# EAGLE board ConnectorPanel (EAGLE 6.6.0), part 1 of 5
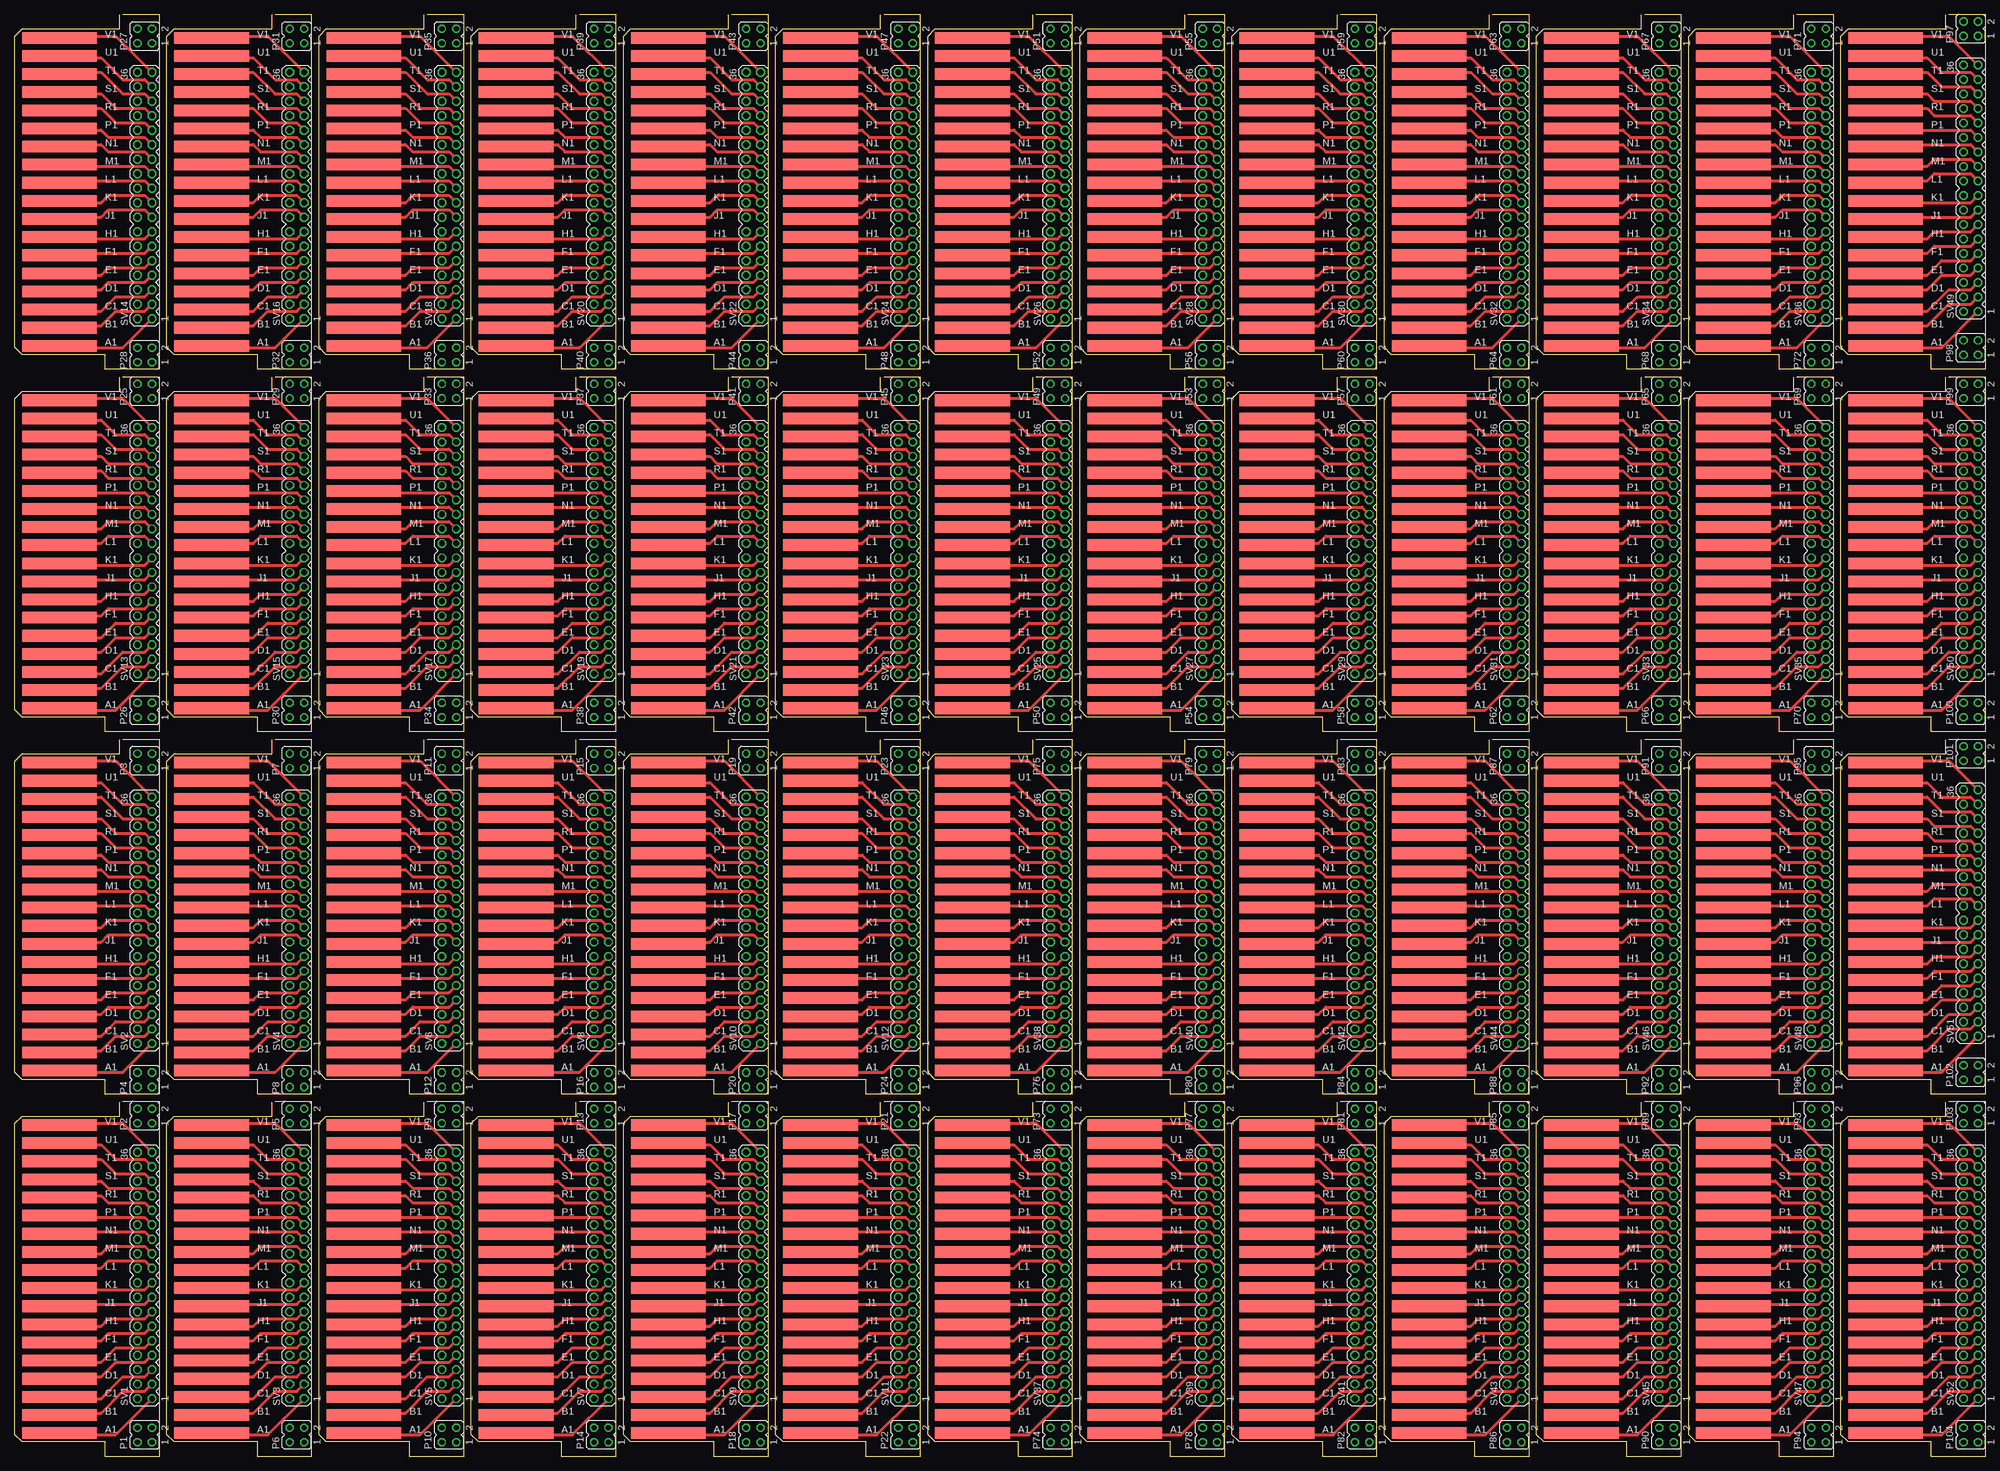
[diagram p0: board, top side]
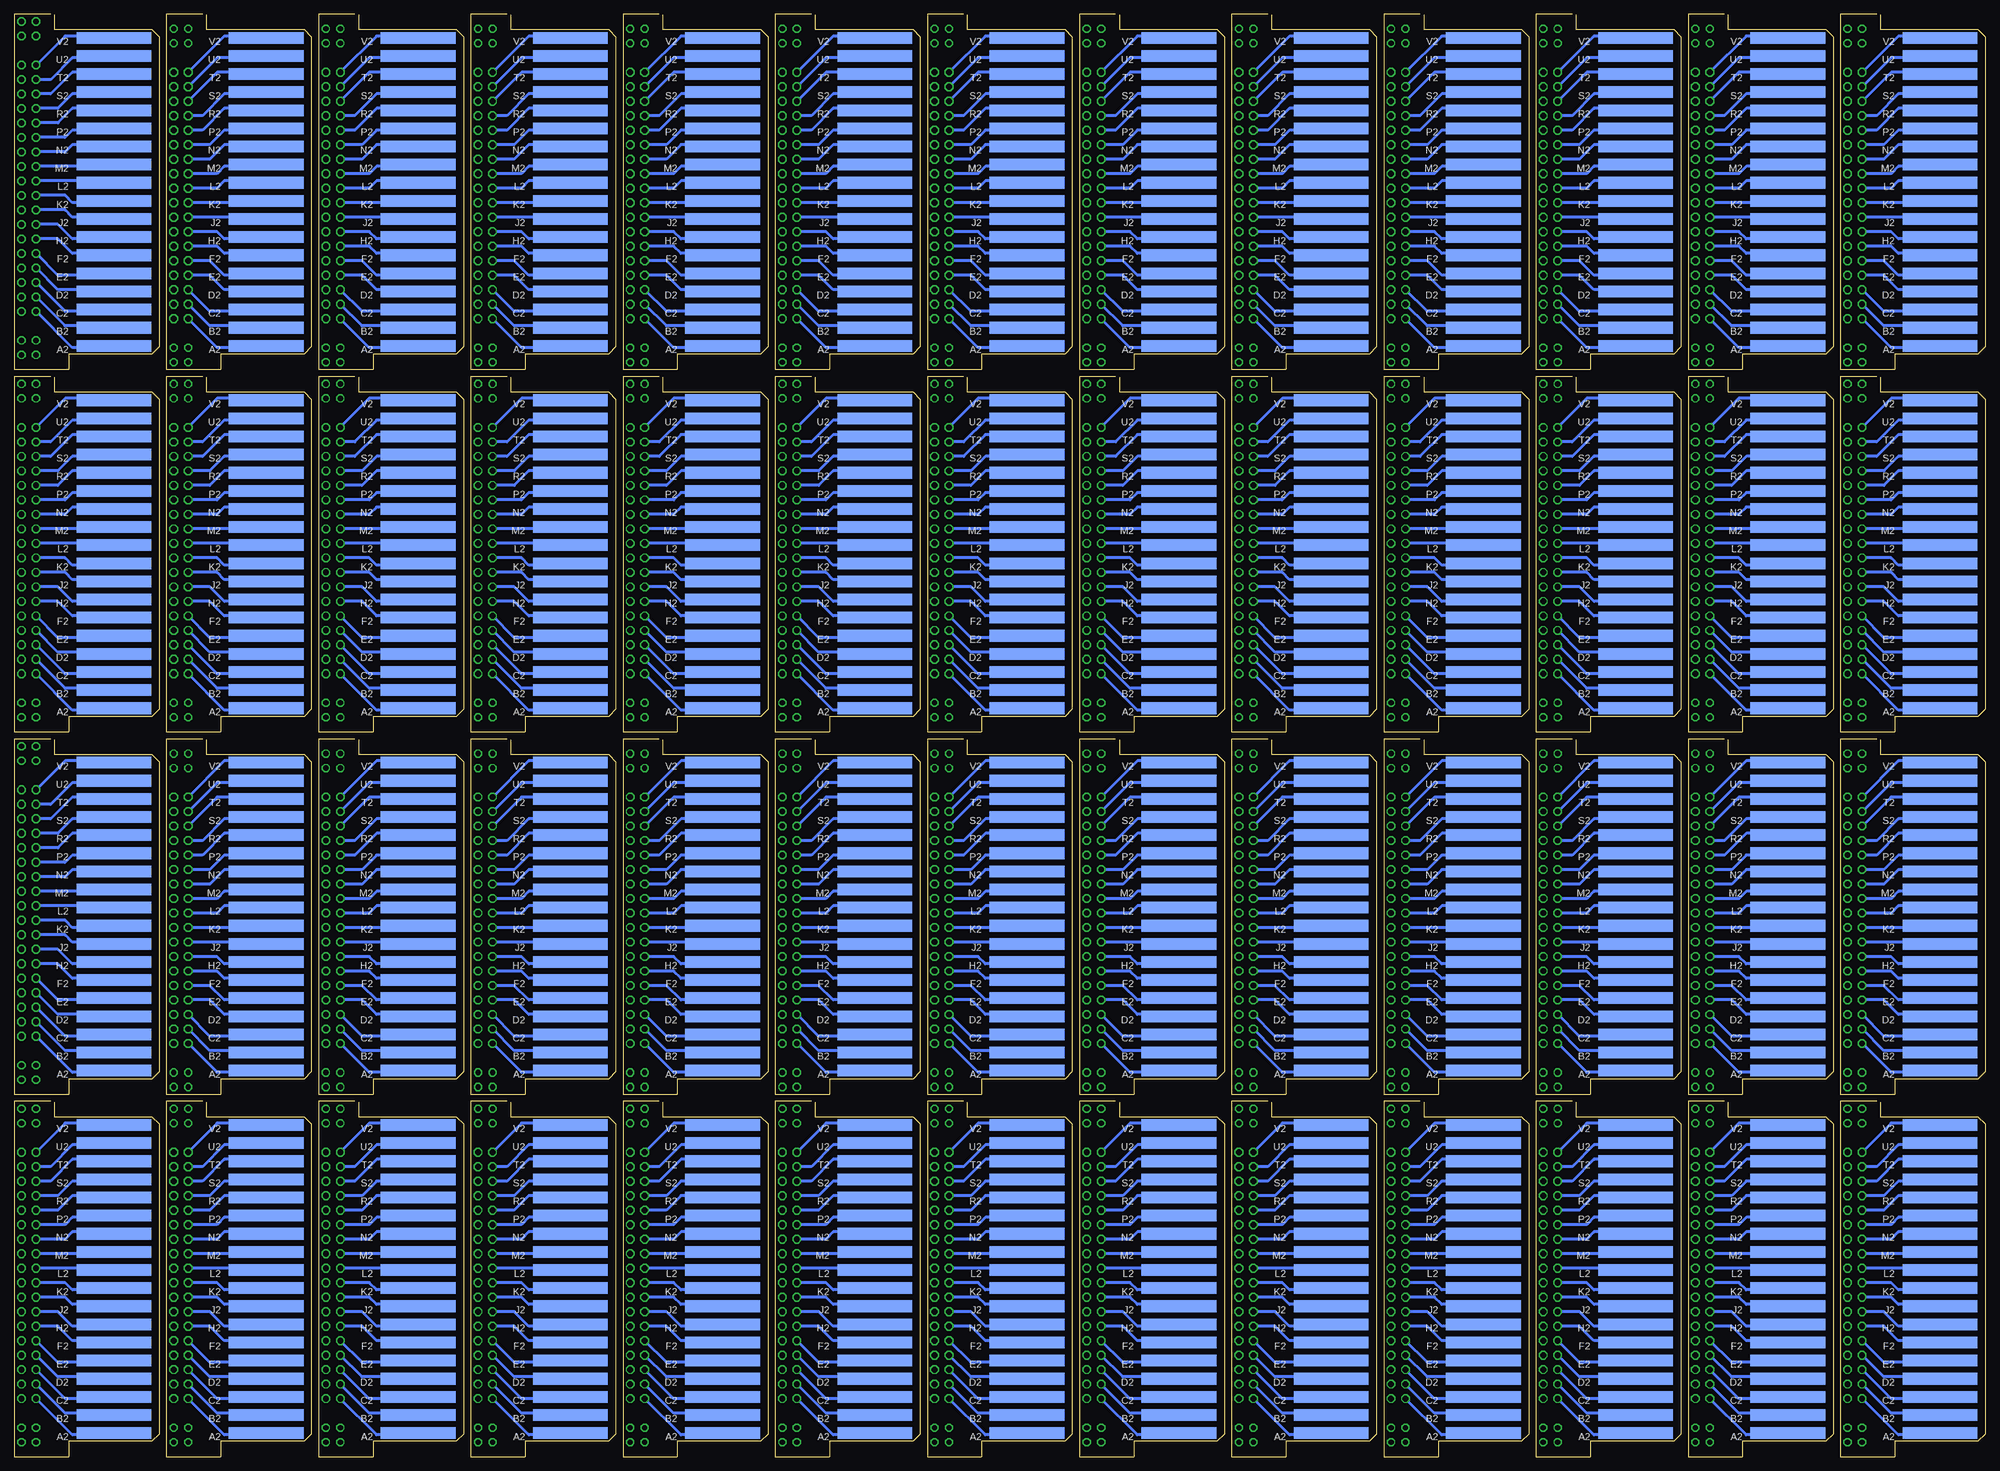
[diagram p1: board, bottom side, seen from below]

Size 345.44 x 252.73 mm. Coordinates in mm from the lower left corner, seen from the top.
Outline: 19.05,62.23 25.4,62.23 25.4,0 15.88,0
Outline: 19.05,125.73 25.4,125.73 25.4,63.5 15.88,63.5
Outline: 45.72,62.23 52.07,62.23 52.07,0 42.55,0
Outline: 42.55,63.5 52.07,63.5 52.07,125.73 45.72,125.73
Outline: 72.39,62.23 78.74,62.23 78.74,0 69.22,0
Outline: 72.39,125.73 78.74,125.73 78.74,63.5 69.22,63.5
Outline: 99.06,62.23 105.41,62.23 105.41,0 95.89,0
Outline: 95.89,63.5 105.41,63.5 105.41,125.73 99.06,125.73
Outline: 125.73,62.23 132.08,62.23 132.08,0 122.56,0
Outline: 125.73,125.73 132.08,125.73 132.08,63.5 122.56,63.5
Outline: 152.4,62.23 158.75,62.23 158.75,0 149.22,0
Outline: 149.22,63.5 158.75,63.5 158.75,125.73 152.4,125.73
Outline: 19.05,189.23 25.4,189.23 25.4,127 15.88,127
Outline: 19.05,252.73 25.4,252.73 25.4,190.5 15.88,190.5
Outline: 45.72,189.23 52.07,189.23 52.07,127 42.55,127
Outline: 42.55,190.5 52.07,190.5 52.07,252.73 45.72,252.73
Outline: 72.39,189.23 78.74,189.23 78.74,127 69.22,127
Outline: 72.39,252.73 78.74,252.73 78.74,190.5 69.22,190.5
Outline: 99.06,189.23 105.41,189.23 105.41,127 95.89,127
Outline: 95.89,190.5 105.41,190.5 105.41,252.73 99.06,252.73
Outline: 125.73,189.23 132.08,189.23 132.08,127 122.56,127
Outline: 125.73,252.73 132.08,252.73 132.08,190.5 122.56,190.5
Outline: 152.4,189.23 158.75,189.23 158.75,127 149.22,127
Outline: 149.22,190.5 158.75,190.5 158.75,252.73 152.4,252.73
Outline: 179.07,189.23 185.42,189.23 185.42,127 175.9,127
Outline: 179.07,252.73 185.42,252.73 185.42,190.5 175.9,190.5
Outline: 205.74,189.23 212.09,189.23 212.09,127 202.56,127
Outline: 202.56,190.5 212.09,190.5 212.09,252.73 205.74,252.73
Outline: 232.41,189.23 238.76,189.23 238.76,127 229.24,127
Outline: 232.41,252.73 238.76,252.73 238.76,190.5 229.24,190.5
Outline: 259.08,189.23 265.43,189.23 265.43,127 255.91,127
Outline: 255.91,190.5 265.43,190.5 265.43,252.73 259.08,252.73
Outline: 285.75,189.23 292.1,189.23 292.1,127 282.57,127
Outline: 285.75,252.73 292.1,252.73 292.1,190.5 282.57,190.5
Outline: 312.42,189.23 318.77,189.23 318.77,127 309.25,127
Outline: 309.25,190.5 318.77,190.5 318.77,252.73 312.42,252.73
Outline: 179.07,62.23 185.42,62.23 185.42,0 175.9,0
Outline: 179.07,125.73 185.42,125.73 185.42,63.5 175.9,63.5
Outline: 205.74,62.23 212.09,62.23 212.09,0 202.56,0
Outline: 202.56,63.5 212.09,63.5 212.09,125.73 205.74,125.73
Outline: 232.41,62.23 238.76,62.23 238.76,0 229.24,0
Outline: 232.41,125.73 238.76,125.73 238.76,63.5 229.24,63.5
Outline: 259.08,62.23 265.43,62.23 265.43,0 255.91,0
Outline: 255.91,63.5 265.43,63.5 265.43,125.73 259.08,125.73
Outline: 285.75,62.23 292.1,62.23 292.1,0 282.57,0
Outline: 285.75,125.73 292.1,125.73 292.1,63.5 282.57,63.5
Outline: 312.42,62.23 318.77,62.23 318.77,0 309.25,0
Outline: 309.25,63.5 318.77,63.5 318.77,125.73 312.42,125.73
Outline: 339.09,252.73 345.44,252.73 345.44,190.5 335.92,190.5
Outline: 339.09,189.23 345.44,189.23 345.44,127 335.92,127
Outline: 339.09,125.73 345.44,125.73 345.44,63.5 335.92,63.5
Outline: 339.09,62.23 345.44,62.23 345.44,0 335.92,0
Copper layers (1+16): Top 0.035mm / dielectric 1.5mm / Bottom 0.035mm
Design rules "16mils": minimum track width 16mil, minimum drill 32mil, track to track 15mil, track to pad 10mil, pad to pad 10mil, via to via 10mil, smd to smd 10mil, copper to edge 13mil, drill to drill 10mil, minimum pad ring 10mil, minimum via ring 8mil, stop-mask expansion 0mil, vias tented up to drill 0mil, thermal gap 10mil
Net classes: 0 default: width 0.508 mm

## Footprints (pad centres in the part's own frame; a part is rotated, then mirrored left to right if it is on the bottom)
JP2Q = drill 0.914 octagon: 1 -1.27,-1.27; 2 -1.27,1.27; 3 1.27,-1.27; 4 1.27,1.27
MA18-2 = drill 1.016 octagon: 1 -21.59,-1.27; 2 -21.59,1.27; 3 -19.05,-1.27; 4 -19.05,1.27; 5 -16.51,-1.27; 6 -16.51,1.27; 7 -13.97,-1.27; 8 -13.97,1.27; 9 -11.43,-1.27; 10 -11.43,1.27; 11 -8.89,-1.27; 12 -8.89,1.27; 13 -6.35,-1.27; 14 -6.35,1.27; 15 -3.81,-1.27; 16 -3.81,1.27; 17 -1.27,-1.27; 18 -1.27,1.27; 19 1.27,-1.27; 20 1.27,1.27; 21 3.81,-1.27; 22 3.81,1.27; 23 6.35,-1.27; 24 6.35,1.27; 25 8.89,-1.27; 26 8.89,1.27; 27 11.43,-1.27; 28 11.43,1.27; 29 13.97,-1.27; 30 13.97,1.27; 31 16.51,-1.27; 32 16.51,1.27; 33 19.05,-1.27; 34 19.05,1.27; 35 21.59,-1.27; 36 21.59,1.27
EDGE-CON2 = smd 13.106 x 2.032: A1 7.938,4.128; B1 7.938,7.303; C1 7.938,10.477; D1 7.938,13.652; E1 7.938,16.828; F1 7.938,20.003; H1 7.938,23.177; J1 7.938,26.352; K1 7.938,29.527; L1 7.938,32.703; M1 7.938,35.877; N1 7.938,39.053; P1 7.938,42.227; R1 7.938,45.403; S1 7.938,48.578; T1 7.938,51.752; U1 7.938,54.928; V1 7.938,58.102 | smd 13.106 x 2.032 bottom: A2 7.938,4.128; B2 7.938,7.303; C2 7.938,10.477; D2 7.938,13.652; E2 7.938,16.828; F2 7.938,20.003; H2 7.938,23.177; J2 7.938,26.352; K2 7.938,29.527; L2 7.938,32.703; M2 7.938,35.877; N2 7.938,39.053; P2 7.938,42.227; R2 7.938,45.403; S2 7.938,48.578; T2 7.938,51.752; U2 7.938,54.928; V2 7.938,58.102

## Placement (x,y rotation side)
P1  [JP2Q]  22.86,3.81 90 top
P2  [JP2Q]  22.86,59.69 90 top
P3  [JP2Q]  22.86,121.92 90 top
P4  [JP2Q]  22.86,66.04 90 top
P5  [JP2Q]  49.53,59.69 90 top
P6  [JP2Q]  49.53,3.81 90 top
P7  [JP2Q]  49.53,121.92 90 top
P8  [JP2Q]  49.53,66.04 90 top
P9  [JP2Q]  76.2,59.69 90 top
P10  [JP2Q]  76.2,3.81 90 top
P11  [JP2Q]  76.2,121.92 90 top
P12  [JP2Q]  76.2,66.04 90 top
P13  [JP2Q]  102.87,59.69 90 top
P14  [JP2Q]  102.87,3.81 90 top
P15  [JP2Q]  102.87,121.92 90 top
P16  [JP2Q]  102.87,66.04 90 top
P17  [JP2Q]  129.54,59.69 90 top
P18  [JP2Q]  129.54,3.81 90 top
P19  [JP2Q]  129.54,121.92 90 top
P20  [JP2Q]  129.54,66.04 90 top
P21  [JP2Q]  156.21,59.69 90 top
P22  [JP2Q]  156.21,3.81 90 top
P23  [JP2Q]  156.21,121.92 90 top
P24  [JP2Q]  156.21,66.04 90 top
P25  [JP2Q]  22.86,186.69 90 top
P26  [JP2Q]  22.86,130.81 90 top
P27  [JP2Q]  22.86,248.92 90 top
P28  [JP2Q]  22.86,193.04 90 top
P29  [JP2Q]  49.53,186.69 90 top
P30  [JP2Q]  49.53,130.81 90 top
P31  [JP2Q]  49.53,248.92 90 top
P32  [JP2Q]  49.53,193.04 90 top
P33  [JP2Q]  76.2,186.69 90 top
P34  [JP2Q]  76.2,130.81 90 top
P35  [JP2Q]  76.2,248.92 90 top
P36  [JP2Q]  76.2,193.04 90 top
P37  [JP2Q]  102.87,186.69 90 top
P38  [JP2Q]  102.87,130.81 90 top
P39  [JP2Q]  102.87,248.92 90 top
P40  [JP2Q]  102.87,193.04 90 top
P41  [JP2Q]  129.54,186.69 90 top
P42  [JP2Q]  129.54,130.81 90 top
P43  [JP2Q]  129.54,248.92 90 top
P44  [JP2Q]  129.54,193.04 90 top
P45  [JP2Q]  156.21,186.69 90 top
P46  [JP2Q]  156.21,130.81 90 top
P47  [JP2Q]  156.21,248.92 90 top
P48  [JP2Q]  156.21,193.04 90 top
P49  [JP2Q]  182.88,186.69 90 top
P50  [JP2Q]  182.88,130.81 90 top
P51  [JP2Q]  182.88,248.92 90 top
P52  [JP2Q]  182.88,193.04 90 top
P53  [JP2Q]  209.55,186.69 90 top
P54  [JP2Q]  209.55,130.81 90 top
P55  [JP2Q]  209.55,248.92 90 top
P56  [JP2Q]  209.55,193.04 90 top
P57  [JP2Q]  236.22,186.69 90 top
P58  [JP2Q]  236.22,130.81 90 top
P59  [JP2Q]  236.22,248.92 90 top
P60  [JP2Q]  236.22,193.04 90 top
P61  [JP2Q]  262.89,186.69 90 top
P62  [JP2Q]  262.89,130.81 90 top
P63  [JP2Q]  262.89,248.92 90 top
P64  [JP2Q]  262.89,193.04 90 top
P65  [JP2Q]  289.56,186.69 90 top
P66  [JP2Q]  289.56,130.81 90 top
P67  [JP2Q]  289.56,248.92 90 top
P68  [JP2Q]  289.56,193.04 90 top
P69  [JP2Q]  316.23,186.69 90 top
P70  [JP2Q]  316.23,130.81 90 top
P71  [JP2Q]  316.23,248.92 90 top
P72  [JP2Q]  316.23,193.04 90 top
P73  [JP2Q]  182.88,59.69 90 top
P74  [JP2Q]  182.88,3.81 90 top
P75  [JP2Q]  182.88,121.92 90 top
P76  [JP2Q]  182.88,66.04 90 top
P77  [JP2Q]  209.55,59.69 90 top
P78  [JP2Q]  209.55,3.81 90 top
P79  [JP2Q]  209.55,121.92 90 top
P80  [JP2Q]  209.55,66.04 90 top
P81  [JP2Q]  236.22,59.69 90 top
P82  [JP2Q]  236.22,3.81 90 top
P83  [JP2Q]  236.22,121.92 90 top
P84  [JP2Q]  236.22,66.04 90 top
P85  [JP2Q]  262.89,59.69 90 top
P86  [JP2Q]  262.89,3.81 90 top
P87  [JP2Q]  262.89,121.92 90 top
P88  [JP2Q]  262.89,66.04 90 top
P89  [JP2Q]  289.56,59.69 90 top
P90  [JP2Q]  289.56,3.81 90 top
P91  [JP2Q]  289.56,121.92 90 top
P92  [JP2Q]  289.56,66.04 90 top
P93  [JP2Q]  316.23,59.69 90 top
P94  [JP2Q]  316.23,3.81 90 top
P95  [JP2Q]  316.23,121.92 90 top
P96  [JP2Q]  316.23,66.04 90 top
P97  [JP2Q]  342.9,250.19 90 top
P98  [JP2Q]  342.9,194.31 90 top
P99  [JP2Q]  342.9,186.69 90 top
P100  [JP2Q]  342.9,130.81 90 top
P101  [JP2Q]  342.9,123.19 90 top
P102  [JP2Q]  342.9,67.31 90 top
P103  [JP2Q]  342.9,59.69 90 top
P104  [JP2Q]  342.9,3.81 90 top
SV1  [MA18-2]  22.86,31.75 90 top
SV2  [MA18-2]  22.86,93.98 90 top
SV3  [MA18-2]  49.53,31.75 90 top
SV4  [MA18-2]  49.53,93.98 90 top
SV5  [MA18-2]  76.2,31.75 90 top
SV6  [MA18-2]  76.2,93.98 90 top
SV7  [MA18-2]  102.87,31.75 90 top
SV8  [MA18-2]  102.87,93.98 90 top
SV9  [MA18-2]  129.54,31.75 90 top
SV10  [MA18-2]  129.54,93.98 90 top
SV11  [MA18-2]  156.21,31.75 90 top
SV12  [MA18-2]  156.21,93.98 90 top
SV13  [MA18-2]  22.86,158.75 90 top
SV14  [MA18-2]  22.86,220.98 90 top
SV15  [MA18-2]  49.53,158.75 90 top
SV16  [MA18-2]  49.53,220.98 90 top
SV17  [MA18-2]  76.2,158.75 90 top
SV18  [MA18-2]  76.2,220.98 90 top
SV19  [MA18-2]  102.87,158.75 90 top
SV20  [MA18-2]  102.87,220.98 90 top
SV21  [MA18-2]  129.54,158.75 90 top
SV22  [MA18-2]  129.54,220.98 90 top
SV23  [MA18-2]  156.21,158.75 90 top
SV24  [MA18-2]  156.21,220.98 90 top
SV25  [MA18-2]  182.88,158.75 90 top
SV26  [MA18-2]  182.88,220.98 90 top
SV27  [MA18-2]  209.55,158.75 90 top
SV28  [MA18-2]  209.55,220.98 90 top
SV29  [MA18-2]  236.22,158.75 90 top
SV30  [MA18-2]  236.22,220.98 90 top
SV31  [MA18-2]  262.89,158.75 90 top
SV32  [MA18-2]  262.89,220.98 90 top
SV33  [MA18-2]  289.56,158.75 90 top
SV34  [MA18-2]  289.56,220.98 90 top
SV35  [MA18-2]  316.23,158.75 90 top
SV36  [MA18-2]  316.23,220.98 90 top
SV37  [MA18-2]  182.88,31.75 90 top
SV38  [MA18-2]  182.88,93.98 90 top
SV39  [MA18-2]  209.55,31.75 90 top
SV40  [MA18-2]  209.55,93.98 90 top
SV41  [MA18-2]  236.22,31.75 90 top
SV42  [MA18-2]  236.22,93.98 90 top
SV43  [MA18-2]  262.89,31.75 90 top
SV44  [MA18-2]  262.89,93.98 90 top
SV45  [MA18-2]  289.56,31.75 90 top
SV46  [MA18-2]  289.56,93.98 90 top
SV47  [MA18-2]  316.23,31.75 90 top
SV48  [MA18-2]  316.23,93.98 90 top
SV49  [MA18-2]  342.9,222.25 90 top
SV50  [MA18-2]  342.9,158.75 90 top
SV51  [MA18-2]  342.9,95.25 90 top
SV52  [MA18-2]  342.9,31.75 90 top
U$1  [EDGE-CON2]  0,0 0 top
U$2  [EDGE-CON2]  0,63.5 0 top
U$3  [EDGE-CON2]  26.67,0 0 top
U$4  [EDGE-CON2]  26.67,63.5 0 top
U$5  [EDGE-CON2]  53.34,0 0 top
U$6  [EDGE-CON2]  53.34,63.5 0 top
U$7  [EDGE-CON2]  80.01,0 0 top
U$8  [EDGE-CON2]  80.01,63.5 0 top
U$9  [EDGE-CON2]  106.68,0 0 top
U$10  [EDGE-CON2]  106.68,63.5 0 top
U$11  [EDGE-CON2]  133.35,0 0 top
U$12  [EDGE-CON2]  133.35,63.5 0 top
U$13  [EDGE-CON2]  0,127 0 top
U$14  [EDGE-CON2]  0,190.5 0 top
U$15  [EDGE-CON2]  26.67,127 0 top
U$16  [EDGE-CON2]  26.67,190.5 0 top
U$17  [EDGE-CON2]  53.34,127 0 top
U$18  [EDGE-CON2]  53.34,190.5 0 top
U$19  [EDGE-CON2]  80.01,127 0 top
U$20  [EDGE-CON2]  80.01,190.5 0 top
U$21  [EDGE-CON2]  106.68,127 0 top
U$22  [EDGE-CON2]  106.68,190.5 0 top
U$23  [EDGE-CON2]  133.35,127 0 top
U$24  [EDGE-CON2]  133.35,190.5 0 top
U$25  [EDGE-CON2]  160.02,127 0 top
U$26  [EDGE-CON2]  160.02,190.5 0 top
U$27  [EDGE-CON2]  186.69,127 0 top
U$28  [EDGE-CON2]  186.69,190.5 0 top
U$29  [EDGE-CON2]  213.36,127 0 top
U$30  [EDGE-CON2]  213.36,190.5 0 top
U$31  [EDGE-CON2]  240.03,127 0 top
U$32  [EDGE-CON2]  240.03,190.5 0 top
U$33  [EDGE-CON2]  266.7,127 0 top
U$34  [EDGE-CON2]  266.7,190.5 0 top
U$35  [EDGE-CON2]  293.37,127 0 top
U$36  [EDGE-CON2]  293.37,190.5 0 top
U$37  [EDGE-CON2]  160.02,0 0 top
U$38  [EDGE-CON2]  160.02,63.5 0 top
U$39  [EDGE-CON2]  186.69,0 0 top
U$40  [EDGE-CON2]  186.69,63.5 0 top
U$41  [EDGE-CON2]  213.36,0 0 top
U$42  [EDGE-CON2]  213.36,63.5 0 top
U$43  [EDGE-CON2]  240.03,0 0 top
U$44  [EDGE-CON2]  240.03,63.5 0 top
U$45  [EDGE-CON2]  266.7,0 0 top
U$46  [EDGE-CON2]  266.7,63.5 0 top
U$47  [EDGE-CON2]  293.37,0 0 top
U$48  [EDGE-CON2]  293.37,63.5 0 top
U$49  [EDGE-CON2]  320.04,190.5 0 top
U$50  [EDGE-CON2]  320.04,127 0 top
U$51  [EDGE-CON2]  320.04,63.5 0 top
U$52  [EDGE-CON2]  320.04,0 0 top

## Library data of the parts
P1-P104 U$1-U$52 = dec-con
SV1-SV52 = con-lstb